# EAGLE board Global Solution arduino #1 (EAGLE 9.7.0)

Size 192.29 x 122.47 mm. Coordinates in mm from the lower left corner, seen from the top.
Outline: 0,0 192.29,0 192.29,122.47 0,122.47 0,0
Copper layers (1*16): Top 0.035mm / dielectric 1.5mm / Bottom 0.035mm
Design rules "default": minimum track width 6mil, minimum drill 0.35mm, track to track 6mil, track to pad 6mil, pad to pad 6mil, via to via 6mil, smd to smd 6mil, copper to edge 40mil, drill to drill 6mil, minimum pad ring 10mil, minimum via ring 8mil, stop-mask expansion 4mil, vias tented up to drill 0mil, thermal gap 10mil

## Footprints (pad centres in the part's own frame; a part is rotated, then mirrored left to right if it is on the bottom)
CAP-THRU-2.54MM = drill 1.016 pad 1.88: 1 -1.27,0; 2 1.27,0
MOTOR = drill 1.118 pad 3.15 octagon: + 2.54,0; - -2.54,0
GL5528 = drill 0.8 pad 1.4: 1 -1.702,0; 2 1.702,0
RESAD1016W63L850D250B = drill 0.83 pad 1.43: 1 -5.08,0; 2 5.08,0
HA-06-SM065 = drill 1 pad 1.676: 1 -2.54,-2.54; 2 0,2.54; 3 2.54,-2.54
SG90 = drill 1.016 long: 1 -2.54,0; 2 0,0; 3 2.54,0
TO92 = drill 0.813 octagon: 1 -1.27,0; 2 0,1.905; 3 1.27,0
ARDUINO-UNO-R3-SHIELD = drill 1.016 pad 1.88: 3.3V 24.13,-2.54; 5V 24.13,0; A0 24.13,12.7; A1 24.13,15.24; A2 24.13,17.78; A3 24.13,20.32; A4 24.13,22.86; A5 24.13,25.4; AREF -24.13,-13.97; D2 -24.13,20.32; D3 -24.13,17.78; D4 -24.13,15.24; D5 -24.13,12.7; D6 -24.13,10.16; D7 -24.13,7.62; D8 -24.13,3.81; D9 -24.13,1.27; D10 -24.13,-1.27; D11 -24.13,-3.81; D12 -24.13,-6.35; D13 -24.13,-8.89; GND@0 24.13,2.54; GND@1 24.13,5.08; GND@2 -24.13,-11.43; IOREF 24.13,-7.62; NC 24.13,-10.16; RES 24.13,-5.08; RX -24.13,25.4; SCL -24.13,-19.05; SDA -24.13,-16.51; TX -24.13,22.86; VIN 24.13,7.62
TO220V = drill 1.016 long: 1 -2.54,-2.54; 2 0,-2.54; 3 2.54,-2.54

## Placement (x,y rotation side)
C5  0.22u  [CAP-THRU-2.54MM]  131.35,90.02 0 top
C6  0.1u  [CAP-THRU-2.54MM]  138.97,90.02 0 top
M1  MOTOR_HDR  [MOTOR]  152.76,27.14 0 top
R1  PHOTOCELL_GL5528  [GL5528]  38.83,92.38 0 top
R2  1k  [RESAD1016W63L850D250B]  32.48,89.84 0 top
R3  10k  [RESAD1016W63L850D250B]  127.82,68.95 180 top
R4  1k  [RESAD1016W63L850D250B]  127.36,24.6 0 top
R6  220  [RESAD1016W63L850D250B]  185.96,100.18 90 top
RPOT1  250k  [HA-06-SM065]  68.04,97.46 0 top
RPOT5  10M  [HA-06-SM065]  165.64,115.42 0 top
SERVO1  SERVOSG90  [SG90]  132.9,66.41 90 top
T1  NPN  [TO92]  132.44,27.14 0 top
U2  ARDUINO-UNO-R3-SHIELD  [ARDUINO-UNO-R3-SHIELD]  47.88,29.84 270 top
U14  LM7805_TO220V  [TO220V]  135.16,97.64 0 top
UTHERM  TMP36GT9Z_TO92  [TO92]  88.36,97.46 0 top

## Library data of the parts
C5 C6 M1 R1-R4 R6 RPOT1 RPOT5 SERVO1 U2 U14 UTHERM = Tinkercad
T1 = Tinkercad; CATEGORY: Transistor; SUB-CATEGORY: BJT; TYPE: NPN

## Nets
M1_-: M1.- T1.3
SERVO1_SIG: R3.1 SERVO1.3
T1_B: R4.2 T1.2
U2_5V: C5.2 C6.1 M1.+ R2.1 R6.1 RPOT1.3 RPOT5.1 SERVO1.2 U2.5V U14.1 U14.3 UTHERM.3
U2_A0: U2.A0 UTHERM.2
U2_A1: RPOT1.2 U2.A1
U2_A2: R1.1 R2.2 U2.A2
U2_A3: RPOT5.2 U2.A3
U2_D8: R4.1 U2.D8
U2_D9: R3.2 U2.D9
U2_GND: C5.1 C6.2 R1.2 RPOT1.1 RPOT5.3 SERVO1.1 T1.1 U2.GND@0 U2.GND@1 U2.GND@2 U14.2 UTHERM.1

## Tracks (layer width: path | path; a pad name or v marks a point on that pad's centre or on a via)
M1_-  (1 unrouted)
SERVO1_SIG  (1 unrouted)
T1_B  (1 unrouted)
U2_5V  (11 unrouted)
U2_A0  (1 unrouted)
U2_A1  (1 unrouted)
U2_A2  (2 unrouted)
U2_A3  (1 unrouted)
U2_D8  (1 unrouted)
U2_D9  (1 unrouted)
U2_GND  (11 unrouted)